# Altium PCB touch-1ch-sp.PcbDoc (part 2 of 3)
Units mm, origin at the board's own origin, x right, y up, seen from the top; angles counter-clockwise.
Board outline 151 x 86.38 mm, 2 copper layers (Top Layer, Bottom Layer); 26 components, 28 nets, 76 pads, 0 vias.
Unrouted connection lines stored in the file: 1.
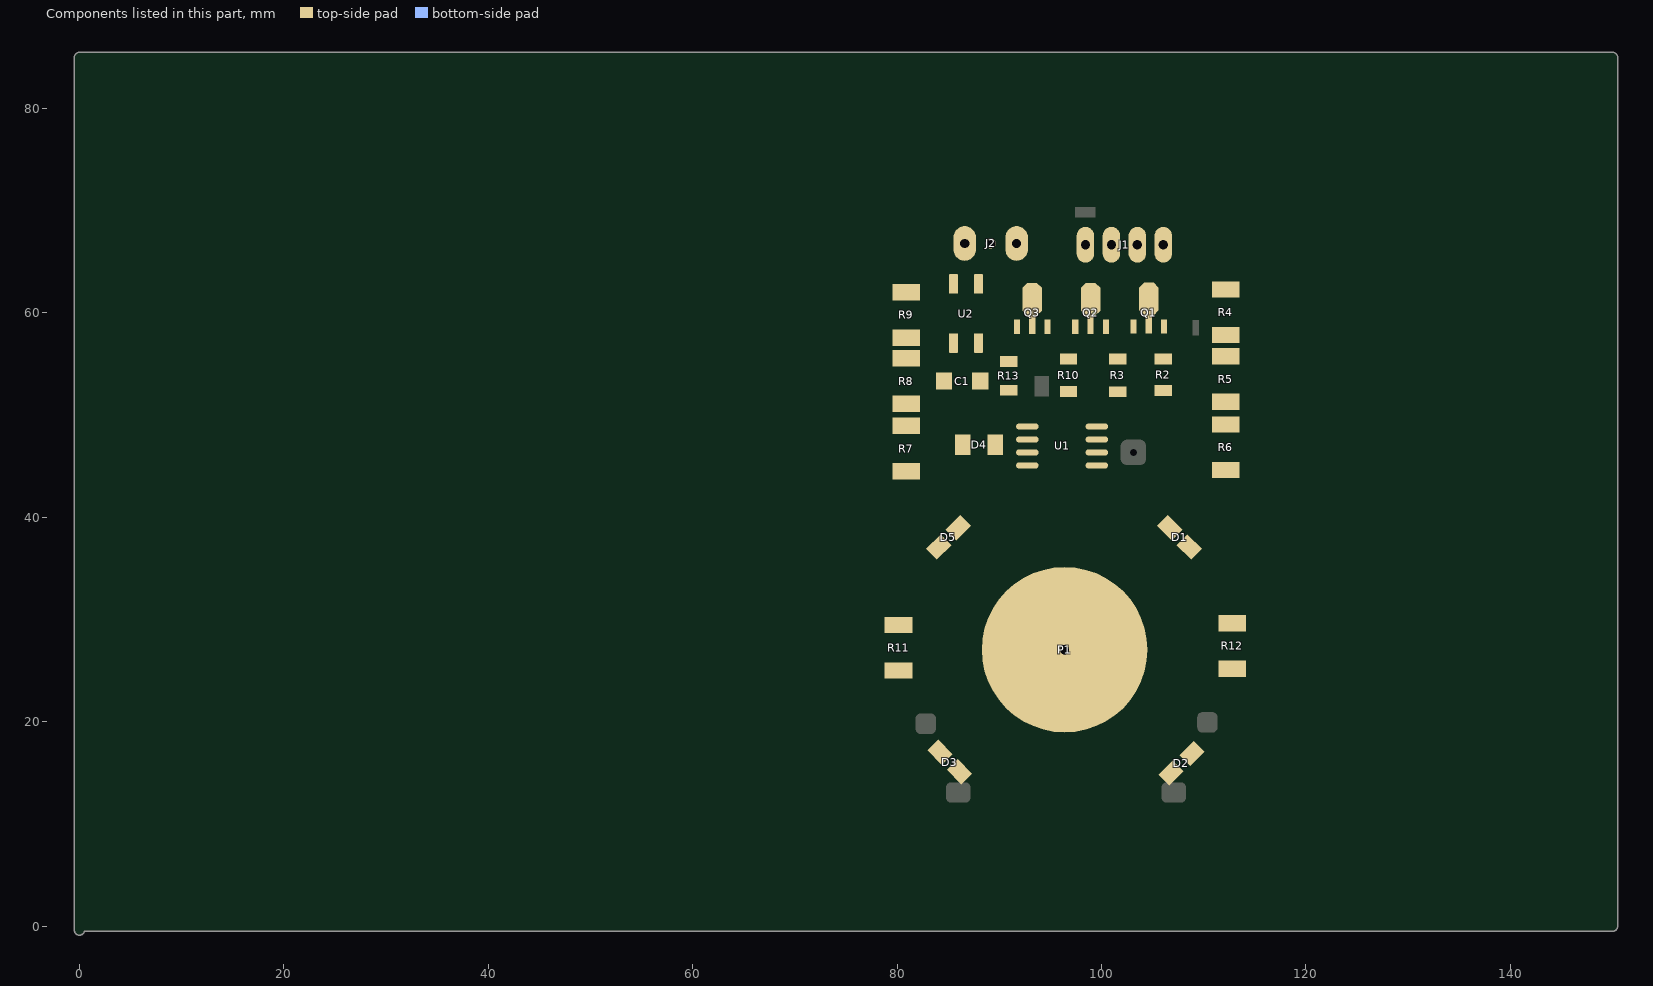
[diagram p2: the components of this part, seen from the top]

## Nets (pads, with @x,y where several pads share a name; then routed paths per layer and width w, separated by ;. In a path a pad name is that pad's centre, name@x,y a point inside that pad or via, vN(x,y) a via of type N, cw(c..) or ccw(c..) an arc to the next point about the centre after c; other vN are vias at no path point) (continued)
copper on no net: (continued)
  Top Layer w0.5: 30.3,43.431 30.3,43.43 30.3,43.426 30.3,43.422 30.3,43.418 30.3,43.414 30.3,43.41 30.299,43.407 30.299,43.403 30.299,43.399 30.299,43.395 30.299,43.391 30.299,43.387 30.299,43.383 30.299,43.38 30.299,43.376 30.299,43.372 30.299,43.368 30.298,43.364 30.298,43.36 30.298,43.357 30.298,43.353 30.298,43.349 30.298,43.345 30.298,43.341 30.298,43.337 30.298,43.333 30.297,43.33 30.297,43.326 30.297,43.322 30.297,43.318 30.297,43.314 30.297,43.31 30.297,43.306 30.297,43.303 30.297,43.3 30.297,43.297 30.296,43.295 30.296,43.292 30.296,43.29 30.296,43.287 30.296,43.285 30.296,43.282 30.296,43.279 30.296,43.277 30.296,43.274 30.296,43.272 30.296,43.269 30.296,43.266 30.296,43.264 30.295,43.261 30.295,43.259 30.295,43.256 30.295,43.254 30.295,43.251 30.295,43.248 30.295,43.246 30.295,43.243 30.295,43.241 30.295,43.238 30.295,43.236 30.295,43.233 30.294,43.23 30.294,43.228 30.294,43.225 30.294,43.223 30.294,43.22 30.294,43.217 30.294,43.215 30.294,43.212 30.294,43.21 30.294,43.207 30.294,43.205 30.294,43.202 30.293,43.199 30.293,43.197 30.293,43.194 30.293,43.192 30.293,43.189 30.293,43.186 30.293,43.184 30.293,43.181 30.293,43.179 30.293,43.176 30.293,43.174 30.292,43.171 30.292,43.168 30.292,43.166 30.292,43.164 30.292,43.163 30.292,43.162 30.292,43.161 30.292,43.159 30.292,43.158 30.292,43.157 30.292,43.155 30.292,43.154 30.292,43.153 30.292,43.152 30.292,43.15 30.292,43.149 30.292,43.148 30.292,43.146 30.292,43.145 30.292,43.144 30.292,43.142 30.291,43.141 30.291,43.14 30.291,43.139 30.291,43.137 30.291,43.136 30.291,43.135 30.291,43.133 30.291,43.132 30.291,43.131 30.291,43.13 30.291,43.128 30.291,43.127 30.291,43.126 30.291,43.124 30.291,43.123 30.291,43.122 30.291,43.12 30.291,43.119 30.291,43.118 30.291,43.117 30.291,43.115 30.291,43.114 30.29,43.113 30.29,43.111 30.29,43.11 30.29,43.109 30.29,43.107 30.29,43.106 30.29,43.105 30.29,43.104 30.29,43.102 30.29,43.101 30.29,43.1 30.29,43.098 30.29,43.097 30.29,43.096 30.29,43.095 30.29,43.093 30.29,43.092 30.29,43.091 30.29,43.089 30.29,43.088 30.29,43.087 30.29,43.085 30.289,43.084 30.289,43.083 30.289,43.082 30.289,43.08 30.289,43.079 30.289,43.078 30.289,43.076 30.289,43.075 30.289,43.074 30.289,43.072 30.289,43.071 30.289,43.07 30.289,43.069 30.289,43.067 30.289,43.066 30.289,43.065 30.289,43.063 30.289,43.062 30.289,43.061 30.289,43.059 30.289,43.058 30.288,43.057 30.288,43.056 30.288,43.054 30.288,43.053 30.288,43.052 30.288,43.05 30.288,43.049 30.288,43.048 30.288,43.047 30.288,43.045 30.288,43.044 30.288,43.043 30.288,43.041 30.288,43.04 30.288,43.039 30.288,43.037 30.288,43.036 30.288,43.035 30.288,43.034 30.288,43.032 30.288,43.031 30.288,43.03 30.287,43.028 30.287,43.027 30.287,43.026 30.287,43.024 30.287,43.023 30.287,43.022 30.287,43.021 30.287,43.019 30.287,43.018 30.287,43.017 30.287,43.015 30.287,43.014 30.287,43.013 30.287,43.011 30.287,43.01 30.287,43.009 30.287,43.008 30.287,43.006 30.287,43.005 30.287,43.004 30.287,43.002 30.287,43.001 30.286,43 30.286,42.998 30.286,42.997 30.286,42.996 30.286,42.995 30.286,42.993 30.286,42.992 30.286,42.991 30.286,42.989 30.286,42.988 30.286,42.987 30.286,42.985 30.286,42.984 30.286,42.983 30.286,42.982 30.286,42.98 30.286,42.979 30.286,42.978 30.286,42.976 30.286,42.975 30.286,42.974 30.286,42.972 30.285,42.971 30.285,42.97 30.285,42.969 30.285,42.967 30.285,42.966 30.285,42.965 30.285,42.963 30.285,42.962 30.285,42.961 30.285,42.959 30.285,42.958 30.285,42.957 30.285,42.956 30.285,42.954 30.285,42.953 30.285,42.952 30.285,42.95 30.285,42.949 30.285,42.948 30.285,42.946 30.285,42.945 30.285,42.944 30.284,42.943 30.284,42.941 30.284,42.94 30.284,42.939 30.284,42.937 30.284,42.936 30.284,42.935 30.284,42.933 30.284,42.932 30.284,42.931 30.284,42.93 30.284,42.928 30.284,42.927 30.284,42.926 30.284,42.924 30.284,42.923 30.284,42.922 30.284,42.92 30.284,42.919 30.284,42.918 30.284,42.917 30.284,42.915 30.283,42.914 30.283,42.913 30.283,42.911 30.283,42.91 30.283,42.909 30.283,42.907 30.283,42.906 30.283,42.904 30.283,42.901 30.283,42.898 30.283,42.896 30.283,42.893 30.283,42.891 30.283,42.888 30.283,42.885 30.282,42.883 30.282,42.88 30.282,42.878 30.282,42.875 30.282,42.872 30.282,42.87 30.282,42.867 30.282,42.865 30.282,42.862 30.282,42.859 30.282,42.857 30.281,42.854 30.281,42.852 30.281,42.849 30.281,42.846 30.281,42.844 30.281,42.841 30.281,42.839 30.281,42.836 30.281,42.833 30.281,42.831 30.281,42.828 30.281,42.826 30.28,42.823 30.28,42.82 30.28,42.818 30.28,42.815 30.28,42.813 30.28,42.81 30.28,42.807 30.28,42.805 30.28,42.802 30.28,42.799 30.28,42.797 30.28,42.794 30.279,42.792 30.279,42.789 30.279,42.786 30.279,42.784 30.279,42.781 30.279,42.779 30.279,42.776 30.279,42.772 30.279,42.768 30.279,42.764 30.279,42.76 30.278,42.757 30.278,42.753 30.278,42.749 30.278,42.745 30.278,42.741 30.278,42.737 30.278,42.733 30.278,42.729 30.278,42.725 30.277,42.721 30.277,42.718 30.277,42.714 30.277,42.71 30.277,42.706 30.277,42.702 30.277,42.698 30.277,42.694 30.277,42.69 30.276,42.686 30.276,42.682 30.276,42.679 30.276,42.675 30.276,42.671 30.276,42.667 30.276,42.663 30.276,42.659 30.276,42.655 30.276,42.651 30.276,42.647 30.275,42.643 30.275,42.64 30.275,42.636 30.275,42.63 30.275,42.625 30.275,42.62 30.275,42.615 30.275,42.61 30.275,42.604 30.275,42.599 30.274,42.594 30.274,42.589 30.274,42.584 30.274,42.578 30.274,42.573 30.274,42.568 30.274,42.563 30.274,42.558 30.274,42.553 30.274,42.547 30.273,42.542 30.273,42.537 30.273,42.532 30.273,42.527 30.273,42.521 30.273,42.516 30.273,42.511 30.273,42.506 30.273,42.501 30.273,42.495 30.273,42.49 30.273,42.484 30.273,42.477 30.273,42.471 30.273,42.464 30.272,42.458 30.272,42.451 30.272,42.445 30.272,42.439 30.272,42.432 30.272,42.426 30.272,42.419 30.272,42.413 30.272,42.406 30.272,42.4 30.272,42.393 30.272,42.387 30.272,42.38 ccw(c39.321,42.378) 30.272,42.374 30.272,42.367 30.272,42.361 30.272,42.355 30.272,42.348 30.272,42.342 30.272,42.335 30.272,42.329 30.272,42.322 30.272,42.315 30.272,42.307 30.272,42.299 30.273,42.292 30.273,42.284 30.273,42.276 30.273,42.268 30.273,42.261 30.273,42.253 30.273,42.245 30.273,42.238 30.273,42.23 30.274,42.222 30.274,42.215 30.274,42.207 30.274,42.199 30.274,42.192 30.274,42.184 30.275,42.176 30.275,42.168 30.275,42.161 30.275,42.153 30.276,42.146 30.276,42.137 30.292,41.621 32.555,39.264 32.548,39.264 32.534,39.264 32.52,39.264 32.507,39.265 32.493,39.265 32.479,39.265 32.465,39.265 32.451,39.265 32.437,39.265 32.424,39.265 32.41,39.265 32.396,39.265 32.382,39.265 32.368,39.265 32.354,39.265 32.34,39.265 32.326,39.265 32.313,39.265 32.299,39.265 32.285,39.265 32.271,39.265 32.257,39.265 32.243,39.265 32.229,39.264 32.211,39.264 32.194,39.264 32.177,39.264 32.159,39.263 32.142,39.263 32.124,39.263 32.107,39.262 32.089,39.262 32.072,39.262 32.054,39.261 32.037,39.261 32.019,39.26 32.002,39.26 31.984,39.259 31.967,39.259 31.949,39.258 31.932,39.257 31.914,39.257 31.897,39.256 31.879,39.255 31.862,39.254 31.844,39.254 31.827,39.253 31.809,39.252 31.792,39.251 31.774,39.25 31.757,39.249 31.739,39.248 31.722,39.247 31.704,39.246 31.687,39.245 31.669,39.244 31.652,39.243 31.634,39.242 31.617,39.24 31.6,39.239 31.582,39.238 31.565,39.236 31.547,39.235 31.53,39.233 31.513,39.232 31.495,39.231 31.478,39.229 31.461,39.227 31.443,39.226 31.426,39.224 31.409,39.222 31.391,39.221 31.374,39.219 31.357,39.217 31.339,39.215 31.322,39.213 31.305,39.211 31.288,39.209 31.271,39.207 31.253,39.205 31.236,39.203 31.219,39.201 31.202,39.199 31.185,39.196 31.168,39.194 31.151,39.192 31.134,39.189 31.117,39.187 31.1,39.184 31.083,39.182 31.066,39.179 31.049,39.177 31.032,39.174 31.015,39.171 30.998,39.168 30.981,39.166 30.964,39.163 30.948,39.16 30.931,39.157 30.914,39.154 30.897,39.151 30.881,39.148 30.864,39.145 30.847,39.141 30.831,39.138 30.814,39.135 30.798,39.131 30.781,39.128 30.765,39.124 30.748,39.121 30.732,39.117 30.715,39.114 30.699,39.11 30.683,39.106 30.666,39.102 30.65,39.098 30.634,39.095 30.617,39.091 30.601,39.086 30.585,39.082 30.569,39.078 30.553,39.074 30.537,39.07 30.521,39.065 30.505,39.061 30.489,39.057 30.473,39.052 30.457,39.048 30.442,39.043 30.426,39.038 30.41,39.033 30.394,39.029 30.379,39.024 30.363,39.019 30.347,39.014 30.332,39.009 30.316,39.004 30.301,38.999 30.283,38.992 30.264,38.986 30.246,38.979 30.228,38.973 30.209,38.966 30.191,38.959 30.173,38.953 30.155,38.946 30.137,38.939 30.119,38.931 30.101,38.924 30.084,38.917 30.066,38.909 30.048,38.902 30.031,38.894 30.013,38.886 29.996,38.879 29.979,38.871 29.961,38.863 29.944,38.854 29.927,38.846 29.91,38.838 29.893,38.829 29.876,38.821 29.86,38.812 29.843,38.803 29.826,38.795 29.807,38.784 29.788,38.773 29.769,38.763 29.75,38.752 29.731,38.741 29.713,38.729 29.694,38.718 29.676,38.707 29.657,38.695 29.637,38.681 29.616,38.668 29.595,38.654 29.575,38.639 29.555,38.625 29.533,38.609 29.51,38.592 29.488,38.575 29.464,38.556 29.44,38.536 29.414,38.515 ccw(c30.791,36.903) 29.384,38.488 29.376,38.481 29.359,38.466 29.342,38.451 29.326,38.436 29.309,38.42 29.293,38.405 29.277,38.39 29.261,38.375 29.245,38.36 29.23,38.345 29.214,38.33 29.199,38.315 29.184,38.3 29.168,38.285 29.154,38.27 29.139,38.255 29.124,38.24 29.11,38.225 29.095,38.21 29.081,38.195 29.067,38.18 29.053,38.164 29.036,38.146 29.019,38.127 29.002,38.108 28.986,38.089 28.969,38.07 28.953,38.052 28.937,38.033 28.921,38.014 28.906,37.995 28.891,37.976 28.875,37.957 28.858,37.935 28.84,37.912 28.823,37.889 28.806,37.867 28.789,37.844 28.77,37.818 28.751,37.791 28.732,37.765 28.712,37.734 28.692,37.704 28.67,37.67 28.648,37.636 28.625,37.598 28.598,37.552 ccw(c31.259,36.015) 28.568,37.499 ccw(c31.21,36.041) 28.427,37.207 ccw(c31.23,36.033) 28.395,37.129 ccw(c31.26,36.021) 28.375,37.075 28.36,37.032 28.346,36.992 28.335,36.957 28.325,36.926 28.315,36.894 28.307,36.867 28.299,36.839 28.293,36.815 28.286,36.791 28.28,36.767 28.274,36.744 28.269,36.724 28.264,36.704 28.26,36.684 28.255,36.664 28.251,36.644 28.246,36.623 28.242,36.603 28.238,36.583 28.235,36.567 28.232,36.551 28.229,36.535 28.226,36.518 28.223,36.502 28.22,36.486 28.217,36.47 28.214,36.453 28.212,36.437 28.209,36.421 28.207,36.404 28.204,36.388 28.202,36.372 28.199,36.355 28.197,36.339 28.195,36.326 28.194,36.314 28.192,36.302 28.19,36.289 28.189,36.277 28.187,36.264 28.186,36.252 28.184,36.24 28.183,36.227 28.181,36.215 28.18,36.202 28.179,36.19 28.177,36.177 28.176,36.165 28.175,36.152 28.173,36.14 28.172,36.127 28.171,36.114 28.17,36.102 28.169,36.089 28.168,36.077 28.167,36.064 28.166,36.051 28.165,36.039 28.164,36.026 28.163,36.013 28.162,36 28.161,35.988 28.16,35.975 28.159,35.962 28.158,35.949 28.157,35.937 28.157,35.924 28.156,35.915 28.155,35.907 28.155,35.898 28.154,35.89 28.154,35.881 28.154,35.872 28.153,35.864 28.153,35.855 28.152,35.847 28.152,35.838 28.151,35.829 28.151,35.821 28.151,35.812 28.15,35.804 28.15,35.795 28.149,35.786 28.149,35.778 28.149,35.769 28.148,35.76 28.148,35.752 28.148,35.743 28.147,35.734 28.147,35.725 28.147,35.717 28.146,35.708 28.146,35.699 28.146,35.691 28.146,35.682 28.145,35.673 28.145,35.664 28.145,35.655 28.145,35.647 28.144,35.638 28.144,35.629 28.144,35.62 28.144,35.612 28.144,35.603 28.143,35.594 28.143,35.585 28.143,35.576 28.143,35.567 28.143,35.559 28.142,35.55 28.142,35.541 28.142,35.532 28.142,35.523 28.142,35.514 28.142,35.505 28.142,35.496 28.142,35.487 28.141,35.478 28.141,35.47 28.141,35.461 28.141,35.452 28.141,35.443 28.141,35.434 28.141,35.425 28.141,35.416 28.141,35.407 28.141,35.398 28.141,35.389 28.141,35.38 28.141,35.371 28.141,35.362 28.14,35.357 28.14,35.353 28.14,35.348 28.14,35.344 28.14,35.339 28.14,35.335 28.14,35.33 28.14,35.325 28.14,35.321 28.14,35.316 28.14,35.312 28.14,35.307 28.14,35.303 28.14,35.298 ccw(c47.337,35.295) 28.14,35.294 28.14,35.289 28.14,35.285 28.14,35.28 28.14,35.275 28.14,35.271 28.14,35.266 28.14,35.262 28.14,35.257 28.14,35.253 28.14,35.248 28.14,35.243 28.14,35.239 28.14,35.234 28.14,35.23 28.141,35.225 28.141,35.221 28.141,35.216 28.141,35.211 28.141,35.207 28.141,35.202 28.141,35.198 28.141,35.193 28.141,35.188 28.141,35.184 28.141,35.179 28.141,35.175 28.141,35.17 28.141,35.165 28.141,35.161 28.141,35.156 28.141,35.151 28.141,35.147 28.141,35.142 28.141,35.138 28.141,35.133 28.141,35.128 28.141,35.124 28.141,35.119 28.141,35.114 28.141,35.11 28.141,35.105 28.141,35.101 28.141,35.096 28.141,35.091 28.141,35.087 28.141,35.082 28.141,35.077 28.141,35.073 28.141,35.068 28.142,35.063 28.142,35.059 28.142,35.054 28.142,35.049 28.142,35.045 28.142,35.04 28.142,35.035 28.142,35.031 28.142,35.026 28.142,35.021 28.142,35.017 28.142,35.012 28.142,35.007 28.142,35.002 28.142,34.998 28.142,34.993 28.142,34.988 28.142,34.984 28.142,34.979 28.142,34.974 28.142,34.97 28.142,34.965 28.143,34.96 28.143,34.955 28.143,34.951 28.143,34.946 28.143,34.941 28.143,34.937 28.143,34.932 28.143,34.927 28.143,34.922 28.143,34.918 28.143,34.913 28.143,34.908 28.143,34.903 28.143,34.899 28.143,34.894 28.143,34.889 28.143,34.884 28.143,34.88 28.143,34.875 28.144,34.87 28.144,34.865 28.144,34.861 28.144,34.856 28.144,34.851 28.144,34.846 28.144,34.842 28.144,34.837 28.144,34.832 28.144,34.827 28.144,34.822 28.144,34.818 28.144,34.813 28.144,34.808 28.144,34.803 28.144,34.798 28.144,34.794 28.144,34.789 28.144,34.784 28.145,34.779 28.145,34.774 28.145,34.77 28.145,34.765 28.145,34.76 28.145,34.755 28.145,34.75 28.145,34.746 28.145,34.741 28.145,34.736 28.145,34.731 28.145,34.726 28.145,34.721 28.145,34.717 28.145,34.712 28.145,34.707 28.145,34.702 28.145,34.697 28.145,34.692 28.146,34.687 28.146,34.683 28.146,34.678 28.146,34.673 28.146,34.668 28.146,34.663 28.146,34.658 28.146,34.653 28.146,34.649 28.146,34.644 28.146,34.639 28.146,34.634 28.146,34.629 28.146,34.624 28.146,34.619 28.146,34.614 28.146,34.609 28.146,34.605 28.146,34.6 28.146,34.595 28.146,34.59 28.147,34.585 28.147,34.58 28.147,34.575 28.147,34.57 28.147,34.565 28.147,34.56 28.147,34.555 28.147,34.55 28.147,34.546 28.147,34.541 28.147,34.536 28.147,34.531 28.147,34.526 28.147,34.521 28.147,34.516 28.147,34.511 28.147,34.506 28.147,34.501 28.147,34.496 28.147,34.491 28.147,34.486 28.147,34.481 28.147,34.476 28.147,34.471 28.147,34.466 28.147,34.461 28.147,34.456 28.147,34.451 28.147,34.446 28.147,34.441 28.147,34.436 28.147,34.431 28.148,34.426 28.148,34.421 28.148,34.416 28.148,34.411 28.148,34.401 28.148,34.391 28.148,34.381 28.148,34.371 28.148,34.361 28.148,34.351 28.148,34.341 28.148,34.326 28.147,18.52 28.147,18.512 28.147,18.488 28.147,18.464 28.147,18.44 28.147,18.416 28.147,18.392 28.147,18.368 28.147,18.344 28.147,18.32 28.147,18.296 28.147,18.272 28.147,18.248 28.147,18.224 28.147,18.2 28.147,18.176 28.147,18.152 28.146,18.128 28.146,18.104 28.146,18.08 28.146,18.056 28.146,18.032 28.146,18.008 28.146,17.984 28.146,17.959 28.146,17.935 28.146,17.911 28.146,17.887 28.146,17.863 28.146,17.839 28.145,17.815 28.145,17.791 28.145,17.767 28.145,17.743 28.145,17.727 28.145,17.711 28.145,17.695 28.145,17.679 28.145,17.663 28.145,17.647 28.145,17.631 28.145,17.615 28.144,17.599 28.144,17.583 28.144,17.567 28.144,17.551 28.144,17.535 28.144,17.519 28.144,17.503 28.144,17.487 28.144,17.471 28.144,17.455 28.144,17.439 28.144,17.423 28.143,17.407 28.143,17.39 28.143,17.374 28.143,17.358 28.143,17.342 28.143,17.326 28.143,17.31 28.143,17.294 28.143,17.278 28.143,17.262 28.142,17.246 28.142,17.23 28.142,17.214 28.142,17.198 28.142,17.182 28.142,17.166 28.142,17.15 28.142,17.134 28.142,17.118 28.142,17.102 28.141,17.086 28.141,17.07 28.141,17.054 28.141,17.038 28.141,17.022 28.141,17.006 28.141,16.99 28.141,16.974 28.141,16.958 28.14,16.942 28.14,16.934 28.14,16.926 28.14,16.918 28.14,16.91 28.14,16.902 28.14,16.894 28.14,16.886 28.14,16.878 28.14,16.87 28.14,16.862 28.14,16.853 28.14,16.845 28.14,16.837 28.14,16.829 28.14,16.821 28.14,16.813 28.139,16.805 28.139,16.797 28.139,16.789 28.139,16.781 28.139,16.773 28.139,16.765 28.139,16.757 28.139,16.749 28.139,16.741 28.139,16.733 28.139,16.725 28.139,16.717 28.139,16.709 28.139,16.701 28.139,16.693 28.139,16.685 28.139,16.677 28.138,16.669 28.138,16.661 28.138,16.653 28.138,16.645 28.138,16.637 28.138,16.629 28.138,16.621 28.138,16.613 28.138,16.605 28.138,16.597 28.138,16.589 28.138,16.581 28.138,16.573 28.138,16.565 28.138,16.557 28.138,16.549 28.137,16.541 28.137,16.533 28.137,16.525 28.137,16.517 28.137,16.509 28.137,16.501 28.137,16.493 28.137,16.485 28.137,16.477 28.137,16.469 28.137,16.461 28.137,16.453 28.137,16.445 28.137,16.437 28.137,16.429 28.137,16.421 28.136,16.413 28.136,16.405 28.136,16.397 28.136,16.389 28.136,16.381 28.136,16.373 28.136,16.365 28.136,16.357 28.136,16.349 28.136,16.341 28.136,16.332 28.136,16.324 28.136,16.316 28.136,16.308 28.136,16.3 28.135,16.292 28.135,16.284 28.135,16.276 28.135,16.268 28.135,16.26 28.135,16.252 28.135,16.244 28.135,16.236 28.135,16.228 28.135,16.22 28.135,16.212 28.135,16.204 28.135,16.196 28.135,16.188 28.135,16.18 28.135,16.172 28.134,16.164 28.134,16.156 28.134,16.148 28.134,16.14 28.134,16.132 28.134,16.124 28.134,16.116 28.134,16.108 28.134,16.1 28.134,16.092 28.134,16.084 28.134,16.076 28.134,16.068 28.134,16.06 28.134,16.052 28.134,16.044 28.133,16.036 28.133,16.028 28.133,16.02 28.133,16.012 28.133,16.004 28.133,15.996 28.133,15.988 28.133,15.98 28.133,15.972 28.133,15.964 28.133,15.956 28.133,15.948 28.133,15.94 28.133,15.932 28.133,15.924 28.132,15.916 28.132,15.908 28.132,15.9 28.132,15.892 28.132,15.884 28.132,15.876 28.132,15.868 28.132,15.86 28.132,15.852 28.132,15.844 28.132,15.835 28.132,15.827 28.132,15.819 28.132,15.811 28.132,15.803 28.132,15.795 28.131,15.787 28.131,15.779 28.131,15.771 28.131,15.763 28.131,15.755 28.131,15.747 28.131,15.739 28.131,15.731 28.131,15.723 28.131,15.715 28.131,15.707 28.131,15.699 28.131,15.691 28.131,15.683 28.131,15.675 28.131,15.667 28.13,15.659 28.13,15.651 28.13,15.643 28.13,15.635 28.13,15.627 28.13,15.619 28.13,15.611 28.13,15.603 28.13,15.595 28.13,15.587 28.13,15.579 28.13,15.571 28.13,15.563 28.13,15.555 28.13,15.547 28.13,15.539 28.129,15.531 28.129,15.523 28.129,15.515 28.129,15.507 28.129,15.499 28.129,15.491 28.129,15.483 28.129,15.475 28.129,15.467 28.129,15.459 28.129,15.451 28.129,15.443 28.129,15.435 28.129,15.427 28.129,15.419 28.129,15.411 28.129,15.403 28.128,15.395 28.128,15.387 28.128,15.379 28.128,15.371 28.128,15.363 28.128,15.355 28.128,15.347 28.128,15.338 28.128,15.322 28.128,15.306 28.128,15.29 28.128,15.274 28.128,15.258 28.127,15.242 28.127,15.226 28.127,15.21 28.127,15.194 28.127,15.178 28.127,15.162 28.127,15.146 28.127,15.13 28.127,15.114 28.126,15.098 28.126,15.082 28.126,15.066 28.126,15.05 28.126,15.034 28.126,15.018 28.126,15.002 28.126,14.986 28.126,14.97 28.126,14.954 28.125,14.938 28.125,14.922 28.125,14.906 28.125,14.89 28.125,14.874 28.125,14.858 28.125,14.841 28.125,14.825 28.125,14.809 28.125,14.793 28.125,14.777 28.124,14.761 28.124,14.745 28.124,14.729 28.124,14.713 28.124,14.697 28.124,14.681 28.124,14.665 28.124,14.649 28.124,14.633 28.124,14.617 28.124,14.601 28.124,14.585 28.123,14.569 28.123,14.553 28.123,14.529 28.123,14.505 28.123,14.481 28.123,14.457 28.123,14.433 28.123,14.409 28.123,14.385 28.123,14.361 28.123,14.336 28.122,14.312 28.122,14.288 28.122,14.264 28.122,14.24 28.122,14.216 28.122,14.192 28.122,14.168 28.122,14.144 28.122,14.12 28.122,14.096 28.122,14.072 28.122,14.048 28.122,14.024 28.122,14 28.122,13.976 28.122,13.952 28.122,13.928 28.122,13.904 28.122,13.88 28.121,13.856 28.121,13.831 28.121,13.807 28.121,13.783 28.121,13.759 ccw(c178.059,13.739) 28.121,13.735 28.121,13.703 28.121,13.671 28.121,13.639 28.121,13.607 28.122,13.575 28.122,13.543 28.122,13.511 28.122,13.479 28.122,13.447 28.122,13.415 28.122,13.383 28.122,13.351 28.122,13.318 28.122,13.286 28.122,13.254 28.122,13.222 28.123,13.19 28.123,13.158 28.123,13.126 28.123,13.094 28.123,13.062 28.123,13.03 28.123,12.998 28.124,12.966 28.124,12.934 28.124,12.894 28.124,12.854 28.125,12.814 28.125,12.773 28.125,12.733 28.126,12.693 28.126,12.653 28.126,12.613 28.127,12.573 28.127,12.533 28.128,12.493 28.128,12.453 28.128,12.413 28.129,12.373 28.129,12.333 28.13,12.293 28.13,12.253 28.131,12.212 28.131,12.172 28.132,12.132 28.133,12.084 28.133,12.036 28.134,11.988 28.135,11.94 28.136,11.892 28.137,11.844 28.137,11.796 28.138,11.748 28.139,11.7 28.14,11.652 28.141,11.603 28.142,11.555 28.143,11.507 28.144,11.459 28.145,11.411 28.147,11.363 28.148,11.307 28.149,11.251 28.151,11.195 28.152,11.139 28.154,11.083 28.155,11.027 28.157,10.971 28.159,10.915 28.16,10.858 28.162,10.802 28.164,10.746 28.166,10.69 28.168,10.634 28.17,10.578 28.172,10.506 28.165,9.447 28.28,9.223 28.281,9.221 28.282,9.217 28.284,9.212 28.285,9.208 28.286,9.204 28.288,9.2 28.289,9.196 28.29,9.192 28.292,9.187 28.293,9.183 28.294,9.179 28.296,9.175 28.297,9.171 28.298,9.167 28.3,9.163 28.301,9.159 28.302,9.155 28.304,9.15 28.305,9.146 28.306,9.142 28.307,9.138 28.309,9.134 28.31,9.13 28.311,9.126 28.313,9.122 28.314,9.118 28.315,9.114 28.317,9.11 28.318,9.106 28.319,9.102 28.321,9.098 28.322,9.094 28.323,9.09 28.325,9.086 28.326,9.082 28.327,9.078 28.328,9.074 28.33,9.07 28.331,9.066 28.332,9.062 28.334,9.058 28.335,9.054 28.336,9.05 28.338,9.046 28.339,9.042 28.341,9.036 28.343,9.03 28.345,9.025 28.347,9.019 28.349,9.013 28.351,9.007 28.353,9.001 28.355,8.995 28.357,8.99 28.359,8.984 28.361,8.978 28.363,8.972 28.365,8.967 28.367,8.961 28.369,8.955 28.371,8.949 28.373,8.944 28.375,8.938 28.377,8.932 28.379,8.927 28.381,8.921 28.383,8.915 28.385,8.91 28.387,8.904 28.389,8.898 28.391,8.893 28.393,8.887 28.395,8.882 28.397,8.876 28.399,8.871 28.401,8.865 28.403,8.859 28.405,8.854 28.407,8.848 28.409,8.843 28.411,8.837 28.413,8.832 28.415,8.826 28.417,8.821 28.419,8.816 28.421,8.81 28.423,8.805 28.425,8.799 28.428,8.794 28.43,8.787 28.433,8.779 28.436,8.772 28.439,8.765 28.441,8.758 28.444,8.751 28.447,8.744 28.45,8.737 28.453,8.73 28.456,8.723 28.458,8.716 28.461,8.709 28.464,8.702 28.467,8.695 28.47,8.688 28.473,8.681 28.476,8.674 28.478,8.667 28.481,8.66 28.484,8.653 28.487,8.646 28.491,8.638 28.495,8.629 28.498,8.621 28.502,8.612 28.506,8.604 28.51,8.595 28.513,8.587 28.517,8.578 28.521,8.57 28.525,8.562 28.529,8.553 28.533,8.543 28.538,8.533 28.543,8.523 28.547,8.513 28.552,8.503 28.557,8.494 28.562,8.482 28.568,8.471 28.574,8.459 28.58,8.448 28.586,8.435 28.593,8.422 28.6,8.409 28.607,8.395 28.615,8.381 28.624,8.365 28.633,8.347 28.645,8.327 28.658,8.305 28.674,8.277 ccw(c30.917,9.625) 28.768,8.132 ccw(c30.932,9.636) 28.796,8.093 28.816,8.066 28.833,8.043 28.848,8.023 28.862,8.005 28.875,7.989 28.887,7.974 28.898,7.96 28.909,7.947 28.92,7.933 28.931,7.921 28.941,7.909 28.951,7.897 28.96,7.887 28.97,7.876 28.979,7.866 28.988,7.855 28.998,7.845 29.006,7.835 29.015,7.826 29.023,7.817 29.031,7.808 29.04,7.799 29.048,7.79 29.057,7.781 29.066,7.772 29.075,7.763 29.084,7.754 29.091,7.746 29.098,7.739 29.106,7.731 29.114,7.724 29.121,7.716 29.129,7.708 29.137,7.701 29.145,7.693 29.152,7.686 29.16,7.678 29.168,7.67 29.176,7.663 29.184,7.655 29.192,7.647 29.201,7.64 29.209,7.632 29.217,7.624 29.226,7.616 29.234,7.609 29.242,7.601 29.251,7.593 29.259,7.585 29.266,7.579 29.273,7.573 29.282,7.565 29.311,7.54 29.355,7.502 ccw(c31.489,10.04) 29.404,7.462 ccw(c31.468,10.014) 29.459,7.418 ccw(c31.447,9.987) 29.529,7.366 ccw(c31.41,9.935) 29.972,7.094 ccw(c31.423,9.961) 30.075,7.044 ccw(c31.437,9.991) 30.151,7.01 ccw(c31.451,10.022) 30.215,6.983 ccw(c31.463,10.053) 30.273,6.96 30.324,6.941 30.373,6.924 30.417,6.909 30.458,6.895 30.5,6.882 30.54,6.87 30.578,6.859 30.615,6.849 30.65,6.839 30.686,6.831 30.718,6.823 30.751,6.815 30.784,6.807 30.815,6.801 30.846,6.794 30.877,6.788 30.907,6.782 30.938,6.777 30.967,6.772 30.995,6.767 31.024,6.763 31.053,6.758 31.081,6.754 31.11,6.75 31.136,6.747 31.163,6.743 31.189,6.74 31.216,6.737 31.242,6.734 31.268,6.732 31.295,6.729 31.322,6.727 31.348,6.724 31.375,6.722 31.402,6.72 31.426,6.719 31.45,6.717 31.475,6.716 31.499,6.715 31.523,6.714 31.547,6.713 31.572,6.712 31.596,6.711 31.621,6.71 31.645,6.71 31.67,6.709 31.695,6.709 31.722,6.709 31.734,6.708 31.747,6.708 31.759,6.708 31.772,6.708 31.782,6.708 31.793,6.708 31.803,6.708 31.813,6.708 31.824,6.708 31.834,6.708 31.844,6.707 31.855,6.707 31.865,6.707 31.876,6.707 31.886,6.707 31.896,6.707 31.907,6.707 31.917,6.707 31.928,6.707 31.938,6.706 31.948,6.706 31.959,6.706 31.969,6.706 31.979,6.706 31.99,6.706 31.998,6.706 32.006,6.705 32.015,6.705 32.023,6.705 32.031,6.705 32.04,6.705 32.048,6.705 32.056,6.705 32.065,6.705 32.073,6.704 32.081,6.704 32.09,6.704 32.098,6.704 32.106,6.704 32.114,6.704 32.123,6.704 32.131,6.703 32.139,6.703 32.148,6.703 32.156,6.703 32.164,6.703 32.173,6.703 32.181,6.703 32.189,6.702 32.198,6.702 32.204,6.702 32.21,6.702 32.216,6.702 32.222,6.702 32.229,6.702 32.235,6.702 32.241,6.701 32.247,6.701 32.254,6.701 32.26,6.701 32.266,6.701 32.272,6.701 32.279,6.701 32.285,6.701 32.291,6.7 32.297,6.7 32.303,6.7 32.31,6.7 32.316,6.7 32.322,6.7 32.328,6.7 32.335,6.7 32.341,6.699 32.347,6.699 32.353,6.699 32.36,6.699 32.366,6.699 32.372,6.699 32.378,6.699 32.385,6.699 32.391,6.698 32.397,6.698 32.403,6.698 32.407,6.698 32.412,6.698 32.416,6.698 32.42,6.698 32.424,6.698 32.428,6.698 32.432,6.697 32.436,6.697 32.441,6.697 32.445,6.697 32.449,6.697 32.453,6.697 32.457,6.697 32.461,6.697 32.466,6.697 32.47,6.697 32.474,6.697 32.478,6.696 32.482,6.696 32.486,6.696 32.49,6.696 32.495,6.696 32.499,6.696 32.503,6.696 32.507,6.696 32.511,6.696 32.515,6.696 32.52,6.696 32.524,6.695 32.528,6.695 32.532,6.695 32.536,6.695 32.54,6.695 32.545,6.695 32.549,6.695 32.553,6.695 32.557,6.695 32.561,6.695 32.565,6.695 32.569,6.694 32.574,6.694 32.578,6.694 32.582,6.694 32.586,6.694 32.59,6.694 32.594,6.694 32.599,6.694 32.603,6.694 32.607,6.694 32.611,6.693 32.615,6.693 32.617,6.693 32.619,6.693 32.621,6.693 32.623,6.693 32.626,6.693 32.628,6.693 32.63,6.693 32.632,6.693 32.634,6.693 32.636,6.693 32.638,6.693 32.64,6.693 32.642,6.693 32.644,6.693 32.646,6.693 32.648,6.693 32.65,6.693 32.653,6.692 32.655,6.692 32.657,6.692 32.659,6.692 32.661,6.692 32.663,6.692 32.665,6.692 32.667,6.692 32.669,6.692 32.671,6.692 32.673,6.692 32.675,6.692 32.677,6.692 32.68,6.692 32.682,6.692 32.684,6.692 32.686,6.692 32.688,6.692 32.69,6.692 32.692,6.692 32.694,6.691 32.696,6.691 32.698,6.691 32.7,6.691 32.702,6.691 32.704,6.691 32.707,6.691 32.709,6.691 32.711,6.691 32.713,6.691 32.715,6.691 32.717,6.691 32.719,6.691 32.721,6.691 32.723,6.691 32.725,6.691 32.727,6.691 32.729,6.691 32.732,6.691 32.734,6.691 32.736,6.69 32.738,6.69 32.74,6.69 32.742,6.69 32.744,6.69 32.746,6.69 32.748,6.69 32.75,6.69 32.752,6.69 32.754,6.69 32.756,6.69 32.759,6.69 32.761,6.69 32.763,6.69 32.765,6.69 32.767,6.69 32.769,6.69 32.771,6.69 32.773,6.69 32.775,6.69 32.777,6.689 32.779,6.689 32.781,6.689 32.783,6.689 32.786,6.689 32.788,6.689 32.79,6.689 32.792,6.689 32.794,6.689 32.796,6.689 32.798,6.689 32.8,6.689 32.802,6.689 32.804,6.689 32.806,6.689 32.808,6.689 32.81,6.689 32.813,6.689 32.815,6.689 32.817,6.689 32.819,6.688 32.821,6.688 32.823,6.688 32.825,6.688 32.827,6.688 32.829,6.688 32.831,6.688 32.833,6.688 32.835,6.688 32.837,6.688 32.84,6.688 32.842,6.688 32.844,6.688 32.846,6.688 32.848,6.688 32.85,6.688 32.852,6.688 32.854,6.688 32.856,6.688 32.858,6.688 32.86,6.687 32.862,6.687 32.864,6.687 32.867,6.687 32.869,6.687 32.871,6.687 32.873,6.687 32.875,6.687 32.877,6.687 32.879,6.687 32.881,6.687 32.883,6.687 32.885,6.687 32.887,6.687 32.889,6.687 32.892,6.687 32.894,6.687 32.896,6.687 32.898,6.687 32.9,6.687 32.902,6.686 32.904,6.686 32.906,6.686 32.908,6.686 32.91,6.686 32.912,6.686 32.914,6.686 32.916,6.686 32.919,6.686 32.921,6.686 32.923,6.686 32.925,6.686 32.927,6.686 32.929,6.686 32.931,6.686 32.933,6.686 32.935,6.686 32.937,6.686 32.939,6.686 32.941,6.686 32.943,6.685 32.946,6.685 32.948,6.685 32.95,6.685 32.952,6.685 32.954,6.685 32.956,6.685 32.958,6.685 32.96,6.685 32.962,6.685 32.964,6.685 32.966,6.685 32.968,6.685 32.97,6.685 32.973,6.685 32.975,6.685 32.977,6.685 32.979,6.685 32.981,6.685 32.983,6.685 32.985,6.684 32.987,6.684 32.989,6.684 32.991,6.684 32.993,6.684 32.995,6.684 32.997,6.684 33,6.684 33.002,6.684 33.004,6.684 33.006,6.684 33.008,6.684 33.01,6.684 33.012,6.684 33.014,6.684 33.016,6.684 33.018,6.684 33.02,6.684 33.022,6.684 33.025,6.684 33.027,6.684 33.029,6.683 33.031,6.683 33.035,6.683 33.039,6.683 33.043,6.683 33.047,6.683 33.052,6.683 33.056,6.683 33.06,6.683 33.064,6.683 33.068,6.683 33.072,6.682 33.076,6.682 33.081,6.682 33.085,6.682 33.089,6.682 33.093,6.682 33.097,6.682 33.101,6.682 33.106,6.682 33.11,6.682 33.114,6.681 33.118,6.681 33.122,6.681 33.126,6.681 33.13,6.681 33.135,6.681 33.139,6.681 33.143,6.681 33.147,6.681 33.151,6.681 33.155,6.681 33.16,6.68 33.164,6.68 33.168,6.68 33.172,6.68 33.176,6.68 33.18,6.68 33.185,6.68 33.189,6.68 33.193,6.68 33.197,6.68 33.201,6.68 33.205,6.679 33.209,6.679 33.214,6.679 33.218,6.679 33.222,6.679 33.226,6.679 33.23,6.679 33.234,6.679 33.239,6.679 33.245,6.679 33.251,6.678 33.257,6.678 33.263,6.678 33.27,6.678 33.276,6.678 33.282,6.678 33.288,6.678 33.295,6.678 33.301,6.677 33.307,6.677 33.313,6.677 33.32,6.677 33.326,6.677 33.332,6.677 33.338,6.677 33.345,6.676 33.351,6.676 33.357,6.676 33.363,6.676 33.369,6.676 33.376,6.676 33.382,6.676 33.388,6.676 33.394,6.675 33.401,6.675 33.407,6.675 33.413,6.675 33.419,6.675 33.426,6.675 33.432,6.675 33.438,6.675 33.444,6.675 33.453,6.674 33.461,6.674 33.469,6.674 33.478,6.674 33.486,6.674 33.494,6.674 33.502,6.674 33.511,6.673 33.519,6.673 33.527,6.673 33.536,6.673 33.544,6.673 33.552,6.673 33.561,6.673 33.569,6.672 33.577,6.672 33.586,6.672 33.594,6.672 33.602,6.672 33.611,6.672 33.619,6.672 33.627,6.671 33.635,6.671 33.644,6.671 33.652,6.671 33.662,6.671 33.673,6.671 33.683,6.671 33.694,6.671 33.704,6.67 33.714,6.67 33.725,6.67 33.735,6.67 33.746,6.67 33.756,6.67 33.766,6.67 33.777,6.67 33.787,6.669 33.8,6.669 33.802,6.669 33.803,6.669 33.805,6.669 33.807,6.669 33.809,6.669 33.811,6.669 33.813,6.669 33.815,6.669 33.817,6.669 33.819,6.669 33.821,6.669 33.823,6.669 33.825,6.669 33.827,6.669 33.829,6.669 33.831,6.669 33.833,6.669 33.835,6.669 33.837,6.669 33.839,6.669 33.841,6.669 33.843,6.669 33.844,6.669 33.846,6.669 33.848,6.669 33.85,6.669 33.852,6.669 33.854,6.669 33.856,6.669 33.858,6.669 33.86,6.669 33.862,6.669 33.864,6.669 33.866,6.669 33.868,6.669 33.87,6.669 33.872,6.669 33.874,6.669 33.876,6.669 33.878,6.668 33.88,6.668 33.882,6.668 33.884,6.668 33.886,6.668 33.888,6.668 33.89,6.668 33.892,6.668 33.894,6.668 33.895,6.668 33.897,6.668 33.899,6.668 33.901,6.668 33.903,6.668 33.905,6.668 33.907,6.668 33.909,6.668 33.911,6.668 33.913,6.668 33.915,6.668 33.917,6.668 33.919,6.668 33.921,6.668 33.923,6.668 33.925,6.668 33.927,6.668 33.929,6.668 33.931,6.668 33.933,6.668 33.935,6.668 33.937,6.668 33.939,6.668 33.941,6.668 33.943,6.668 33.945,6.668 33.947,6.668 33.949,6.668 33.951,6.668 33.953,6.668 33.955,6.668 33.957,6.668 33.959,6.668 33.961,6.668 33.963,6.668 33.965,6.668 33.967,6.668 33.969,6.668 33.971,6.668 33.973,6.668 33.975,6.668 33.977,6.668 33.979,6.668 33.98,6.667 33.982,6.667 33.984,6.667 33.986,6.667 33.988,6.667 33.99,6.667 33.992,6.667 33.994,6.667 33.996,6.667 34,6.667 34.004,6.667 34.008,6.667 34.012,6.667 34.016,6.667 34.02,6.667 34.024,6.667 34.028,6.667 34.032,6.667 34.036,6.667 34.04,6.667 34.044,6.667 34.048,6.667 34.052,6.667 34.056,6.667 34.06,6.667 34.064,6.667 34.068,6.667 34.072,6.667 34.076,6.667 34.08,6.667 34.084,6.667 34.088,6.667 34.092,6.667 34.096,6.667 34.1,6.666 34.104,6.666 34.108,6.666 34.112,6.666 34.116,6.666 34.12,6.666 34.124,6.666 34.129,6.666 34.133,6.666 34.137,6.666 34.141,6.666 34.145,6.666 34.149,6.666 34.153,6.666 34.157,6.666 34.161,6.666 34.165,6.666 34.169,6.666 34.173,6.666 34.177,6.666 34.181,6.666 34.187,6.666 34.193,6.666 34.199,6.666 34.205,6.666 34.211,6.666 34.217,6.666 34.224,6.666 34.23,6.666 34.236,6.666 34.242,6.666 34.248,6.666 34.254,6.666 34.26,6.666 34.266,6.666 34.272,6.666 34.278,6.666 34.284,6.666 34.291,6.665 34.297,6.665 34.303,6.665 34.309,6.665 34.315,6.665 34.321,6.665 34.327,6.665 34.333,6.665 34.34,6.665 34.346,6.665 34.352,6.665 34.358,6.665 34.364,6.665 34.37,6.665 34.378,6.665 34.387,6.665 34.395,6.665 34.403,6.665 34.411,6.665 34.419,6.665 34.428,6.665 34.436,6.665 34.444,6.666 34.452,6.666 34.461,6.666 34.469,6.666 34.477,6.666 34.485,6.666 34.493,6.666 34.502,6.666 34.51,6.666 34.518,6.666 34.526,6.666 34.535,6.666 34.543,6.666 34.551,6.666 34.559,6.666 34.568,6.666 34.576,6.666 34.584,6.666 34.592,6.666 34.601,6.666 34.611,6.667 34.621,6.667 34.632,6.667 34.642,6.667 34.652,6.667 34.663,6.667 34.673,6.667 34.683,6.667 34.694,6.668 34.704,6.668 34.714,6.668 34.725,6.668 34.735,6.668 34.746,6.669 34.756,6.669 34.766,6.669 34.777,6.669 34.787,6.669 34.797,6.67 34.808,6.67 34.818,6.67 34.828,6.67 34.839,6.67 34.849,6.671 34.86,6.671 34.87,6.671 34.88,6.671 34.891,6.672 34.903,6.672 34.916,6.672 34.928,6.673 34.94,6.673 34.953,6.674 34.965,6.674 34.978,6.674 34.99,6.675 35.003,6.675 35.015,6.676 35.027,6.676 35.04,6.677 35.052,6.677 35.065,6.678 35.077,6.678 35.089,6.679 35.102,6.679 35.114,6.68 35.127,6.68 35.139,6.681 35.151,6.681 35.164,6.682 35.176,6.683 35.189,6.683 35.201,6.684 35.213,6.684 35.226,6.685 35.238,6.686 35.25,6.686 35.263,6.687 35.275,6.688 35.287,6.689 35.3,6.689 35.312,6.69 35.324,6.691 35.337,6.692 35.349,6.692 35.361,6.693 35.373,6.694 35.386,6.695 35.398,6.696 35.41,6.697 35.422,6.698 35.435,6.698 35.447,6.699 35.459,6.7 35.471,6.701 35.483,6.702 35.496,6.703 35.508,6.704 35.52,6.705 35.532,6.706 35.544,6.707 35.556,6.708 35.568,6.71 35.58,6.711 35.593,6.712 35.605,6.713 35.617,6.714 35.629,6.715 35.641,6.716 35.653,6.718 35.665,6.719 35.677,6.72 35.689,6.721 35.701,6.723 35.713,6.724 35.725,6.725 35.737,6.727 35.748,6.728 35.76,6.729 35.772,6.731 35.784,6.732 35.796,6.734 35.808,6.735 35.82,6.737 35.833,6.738 35.838,6.733 ccw(c41.327,10.799) 35.949,6.586 ccw(c41.272,10.756) 36.074,6.432 ccw(c41.219,10.712) 36.211,6.272 ccw(c41.168,10.667) 36.368,6.102 ccw(c41.119,10.621) 36.554,5.913 ccw(c41.073,10.573) 36.79,5.696 ccw(c40.999,10.485) 38.17,4.771 ccw(c41.019,10.526) 38.565,4.592 ccw(c41.045,10.588) 38.848,4.482 ccw(c41.067,10.651) 39.083,4.403 ccw(c41.088,10.715) 39.288,4.341 ccw(c41.106,10.779) 39.475,4.291 ccw(c41.123,10.846) 39.651,4.25 ccw(c41.138,10.914) 39.814,4.215 ccw(c41.151,10.983) 39.965,4.187 ccw(c41.163,11.051) 40.11,4.164 ccw(c41.174,11.121) 40.248,4.144 ccw(c41.183,11.191) 40.381,4.127 ccw(c41.192,11.263) 40.514,4.114 ccw(c41.199,11.337) 40.641,4.103 ccw(c41.204,11.413) 40.769,4.094 40.89,4.088 41.012,4.083 41.127,4.081 41.242,4.081 41.35,4.082 41.459,4.085 41.568,4.089 41.678,4.095 41.78,4.101 41.883,4.109 41.987,4.119 42.09,4.129 42.194,4.142 ccw(c41.487,9.898) 42.319,4.158 ccw(c41.482,9.932) 42.649,4.216 ccw(c41.47,9.991) 42.898,4.272 ccw(c41.455,10.049) 43.113,4.33 ccw(c41.439,10.108) 43.307,4.39 ccw(c41.42,10.166) 43.483,4.45 ccw(c41.398,10.224) 43.652,4.514 ccw(c41.376,10.282) 43.809,4.579 ccw(c41.351,10.34) 43.965,4.648 ccw(c41.324,10.398) 44.114,4.719 ccw(c41.296,10.456) 44.261,4.793 ccw(c41.266,10.513) 44.406,4.872 ccw(c41.234,10.57) 44.549,4.954 ccw(c41.201,10.627) 44.695,5.042 ccw(c41.165,10.684) 44.842,5.137 ccw(c41.128,10.74) 44.992,5.239 ccw(c41.088,10.796) 45.146,5.351 ccw(c41.047,10.852) 45.306,5.474 ccw(c41.004,10.907) 45.474,5.611 ccw(c40.958,10.96) 45.653,5.768 ccw(c40.911,11.013) 45.857,5.959 ccw(c40.86,11.065) 46.102,6.212 ccw(c40.802,11.118) 46.53,6.719 46.797,6.718 46.809,6.718 46.821,6.718 46.834,6.718 46.846,6.718 46.858,6.718 46.87,6.718 46.883,6.718 46.895,6.719 46.907,6.719 46.917,6.719 46.928,6.719 46.938,6.719 46.948,6.719 46.958,6.719 46.968,6.719 46.979,6.719 46.989,6.719 46.999,6.719 47.009,6.719 47.019,6.719 47.03,6.719 47.04,6.719 47.05,6.719 47.06,6.719 47.07,6.719 47.081,6.719 47.091,6.72 47.101,6.72 47.111,6.72 47.121,6.72 47.13,6.72 47.138,6.72 47.146,6.72 47.154,6.72 47.162,6.72 47.17,6.72 47.179,6.72 47.187,6.72 47.195,6.72 47.203,6.721 47.211,6.721 47.22,6.721 47.228,6.721 47.236,6.721 47.244,6.721 47.252,6.721 47.26,6.721 47.269,6.721 47.277,6.721 47.285,6.721 47.293,6.722 47.301,6.722 47.309,6.722 47.318,6.722 47.326,6.722 47.332,6.722 47.338,6.722 47.344,6.722 47.35,6.722 47.356,6.722 47.363,6.722 47.369,6.722 47.375,6.723 47.381,6.723 47.387,6.723 47.393,6.723 47.399,6.723 47.405,6.723 47.412,6.723 47.418,6.723 47.424,6.723 47.43,6.723 47.436,6.723 47.442,6.723 47.448,6.724 47.454,6.724 47.461,6.724 47.467,6.724 47.473,6.724 47.479,6.724 47.485,6.724 47.491,6.724 47.497,6.724 47.504,6.724 47.51,6.724 47.516,6.724 47.522,6.725 47.528,6.725 47.534,6.725 47.538,6.725 47.542,6.725 47.546,6.725 47.551,6.725 47.555,6.725 47.559,6.725 47.563,6.725 47.567,6.725 47.571,6.725 47.575,6.725 47.579,6.725 47.583,6.726 47.587,6.726 47.591,6.726 47.596,6.726 47.6,6.726 47.604,6.726 47.608,6.726 47.612,6.726 47.616,6.726 47.62,6.726 47.624,6.726 47.628,6.726 47.632,6.726 47.636,6.726 47.64,6.726 47.645,6.726 47.649,6.727 47.653,6.727 47.657,6.727 47.661,6.727 47.665,6.727 47.669,6.727 47.673,6.727 47.677,6.727 47.681,6.727 47.685,6.727 47.69,6.727 47.694,6.727 47.698,6.727 47.702,6.727 47.706,6.727 47.71,6.728 47.714,6.728 47.718,6.728 47.722,6.728 47.726,6.728 47.73,6.728 47.735,6.728 47.739,6.728 47.743,6.728 47.745,6.728 47.747,6.728 47.749,6.728 47.751,6.728 47.753,6.728 47.755,6.728 47.757,6.728 47.759,6.728 47.761,6.728 47.763,6.728 47.765,6.728 47.767,6.729 47.769,6.729 47.771,6.729 47.773,6.729 47.775,6.729 47.777,6.729 47.779,6.729 47.782,6.729 47.784,6.729 47.786,6.729 47.788,6.729 47.79,6.729 47.792,6.729 47.794,6.729 47.796,6.729 47.798,6.729 47.8,6.729 47.802,6.729 47.804,6.729 47.806,6.729 47.808,6.729 47.81,6.729 47.812,6.729 47.814,6.729 47.816,6.729 47.818,6.729 47.82,6.729 47.822,6.729 47.824,6.73 47.827,6.73 47.829,6.73 47.831,6.73 47.833,6.73 47.835,6.73 47.837,6.73 47.839,6.73 47.841,6.73 47.843,6.73 47.845,6.73 47.847,6.73 47.849,6.73 47.851,6.73 47.853,6.73 47.855,6.73 47.857,6.73 47.859,6.73 47.861,6.73 47.863,6.73 47.865,6.73 47.867,6.73 47.869,6.73 47.871,6.73 47.874,6.73 47.876,6.73 47.878,6.73 47.88,6.73 47.882,6.73 47.884,6.731 47.886,6.731 47.888,6.731 47.89,6.731 47.892,6.731 47.894,6.731 47.896,6.731 47.898,6.731 47.9,6.731 47.902,6.731 47.904,6.731 47.906,6.731 47.908,6.731 47.91,6.731 47.912,6.731 47.914,6.731 47.916,6.731 47.918,6.731 47.921,6.731 47.923,6.731 47.925,6.731 47.927,6.731 47.929,6.731 47.931,6.731 47.933,6.731 47.935,6.731 47.937,6.731 47.939,6.731 47.941,6.732 47.943,6.732 47.945,6.732 47.947,6.732 47.949,6.732 47.951,6.732 47.953,6.732 47.955,6.732 47.957,6.732 47.959,6.732 47.961,6.732 47.963,6.732 47.966,6.732 47.968,6.732 47.97,6.732 47.972,6.732 47.974,6.732 47.976,6.732 47.978,6.732 47.98,6.732 47.982,6.732 47.984,6.732 47.986,6.732 47.988,6.732 47.99,6.732 47.992,6.732 47.994,6.732 47.996,6.732 47.998,6.733 48,6.733 48.002,6.733 48.004,6.733 48.006,6.733 48.008,6.733 48.01,6.733 48.013,6.733 48.015,6.733 48.017,6.733 48.019,6.733 48.021,6.733 48.023,6.733 48.025,6.733 48.027,6.733 48.029,6.733 48.031,6.733 48.033,6.733 48.035,6.733 48.037,6.733 48.039,6.733 48.041,6.733 48.043,6.733 48.045,6.733 48.047,6.733 48.049,6.733 48.051,6.733 48.053,6.733 48.055,6.734 48.058,6.734 48.06,6.734 48.062,6.734 48.064,6.734 48.066,6.734 48.068,6.734 48.07,6.734 48.072,6.734 48.074,6.734 48.076,6.734 48.078,6.734 48.08,6.734 48.082,6.734 48.084,6.734 48.086,6.734 48.088,6.734 48.09,6.734 48.092,6.734 48.094,6.734 48.096,6.734 48.098,6.734 48.1,6.734 48.102,6.734 48.105,6.734 48.107,6.734 48.109,6.734 48.111,6.734 48.113,6.734 48.115,6.735 48.117,6.735 48.119,6.735 48.121,6.735 48.123,6.735 48.125,6.735 48.127,6.735 48.129,6.735 48.131,6.735 48.133,6.735 48.135,6.735 48.137,6.735 48.139,6.735 48.141,6.735 48.143,6.735 48.145,6.735 48.147,6.735 48.15,6.735 48.154,6.735 48.158,6.735 48.162,6.735 48.166,6.735 48.17,6.735 48.174,6.736 48.178,6.736 48.182,6.736 48.186,6.736 48.19,6.736 48.194,6.736 48.199,6.736 48.203,6.736 48.207,6.736 48.211,6.736 48.215,6.736 48.219,6.736 48.223,6.736 48.227,6.736 48.231,6.736 48.235,6.737 48.239,6.737 48.244,6.737 48.248,6.737 48.252,6.737 48.256,6.737 48.26,6.737 48.264,6.737 48.268,6.737 48.272,6.737 48.276,6.737 48.28,6.737 48.284,6.737 48.289,6.737 48.293,6.737 48.297,6.738 48.301,6.738 48.305,6.738 48.309,6.738 48.313,6.738 48.317,6.738 48.321,6.738 48.325,6.738 48.329,6.738 48.333,6.738 48.338,6.738 48.342,6.738 48.346,6.738 48.35,6.738 48.354,6.738 48.36,6.739 48.366,6.739 48.372,6.739 48.378,6.739 48.385,6.739 48.391,6.739 48.397,6.739 48.403,6.739 48.409,6.739 48.415,6.739 48.421,6.739 48.428,6.739 48.434,6.74 48.44,6.74 48.446,6.74 48.452,6.74 48.458,6.74 48.464,6.74 48.47,6.74 48.477,6.74 48.483,6.74 48.489,6.74 48.495,6.74 48.501,6.741 48.507,6.741 48.513,6.741 48.519,6.741 48.526,6.741 48.532,6.741 48.538,6.741 48.544,6.741 48.55,6.741 48.556,6.741 48.562,6.741 48.571,6.741 48.579,6.741 48.587,6.742 48.595,6.742 48.603,6.742 48.611,6.742 48.62,6.742 48.628,6.742 48.636,6.742 48.644,6.742 48.652,6.742 48.66,6.742 48.669,6.743 48.677,6.743 48.685,6.743 48.693,6.743 48.701,6.743 48.709,6.743 48.718,6.743 48.726,6.743 48.734,6.743 48.742,6.743 48.75,6.743 48.759,6.743 48.767,6.743 48.777,6.744 48.787,6.744 48.797,6.744 48.808,6.744 48.818,6.744 48.828,6.744 48.84,6.744 48.842,6.744 48.846,6.744 48.849,6.744 48.853,6.744 48.856,6.744 48.86,6.744 48.863,6.744 48.867,6.744 48.87,6.744 48.874,6.744 48.877,6.744 48.881,6.744 48.885,6.744 48.888,6.744 48.892,6.744 48.895,6.744 48.899,6.744 48.902,6.744 48.906,6.744 48.909,6.744 48.913,6.744 48.917,6.744 48.922,6.744 48.926,6.745 48.931,6.745 48.935,6.745 48.94,6.745 48.944,6.745 48.949,6.745 48.953,6.745 48.957,6.745 48.962,6.745 48.966,6.745 48.971,6.745 48.975,6.745 48.98,6.745 48.984,6.745 48.988,6.745 48.993,6.745 48.997,6.745 49.002,6.745 49.007,6.745 49.012,6.745 49.018,6.745 49.023,6.745 49.028,6.745 49.034,6.745 49.039,6.745 49.044,6.745 49.05,6.745 49.055,6.745 49.06,6.745 49.066,6.745 49.071,6.745 49.076,6.745 49.082,6.745 49.087,6.745 49.093,6.745 49.1,6.745 49.106,6.745 49.112,6.745 49.118,6.745 49.124,6.745 49.131,6.745 49.137,6.745 49.143,6.745 49.149,6.745 49.156,6.745 49.162,6.745 49.168,6.745 49.174,6.745 49.18,6.746 49.188,6.746 49.195,6.746 49.202,6.746 49.209,6.746 49.216,6.746 49.223,6.746 49.23,6.746 49.237,6.746 49.244,6.746 49.251,6.746 49.259,6.746 49.266,6.746 49.274,6.746 49.282,6.746 49.29,6.746 49.298,6.746 49.306,6.746 49.314,6.746 49.322,6.746 49.33,6.746 49.338,6.746 49.346,6.746 49.354,6.746 49.363,6.745 49.371,6.745 49.38,6.745 49.389,6.745 49.398,6.745 49.407,6.745 49.416,6.745 49.425,6.745 49.434,6.745 49.443,6.745 49.451,6.745 49.461,6.745 49.471,6.745 49.481,6.745 49.491,6.745 49.5,6.745 49.51,6.745 49.52,6.745 49.53,6.745 49.539,6.745 49.55,6.745 49.561,6.745 49.571,6.745 49.582,6.744 49.593,6.744 49.603,6.744 49.614,6.744 49.625,6.744 49.635,6.744 49.647,6.744 49.659,6.744 49.67,6.744 49.682,6.743 49.693,6.743 49.705,6.743 49.716,6.743 49.729,6.743 49.729,6.737 49.729,6.731 49.729,6.725 49.729,6.719 49.729,6.713 49.729,6.707 49.729,6.702 49.729,6.696 49.728,6.69 49.728,6.684 49.728,6.678 49.728,6.672 49.728,6.666 49.728,6.66 49.728,6.654 49.728,6.648 49.728,6.642 49.728,6.637 49.728,6.631 49.728,6.625 49.728,6.619 49.728,6.613 49.728,6.607 49.728,6.601 49.728,6.595 49.728,6.589 49.728,6.584 49.727,6.578 49.727,6.572 49.727,6.566 49.727,6.56 49.727,6.554 49.727,6.548 49.727,6.543 49.727,6.537 49.727,6.531 49.727,6.526 49.727,6.521 49.727,6.516 49.726,6.511 49.726,6.507 49.726,6.502 49.726,6.497 49.726,6.492 49.726,6.487 49.726,6.482 49.726,6.478 49.726,6.473 49.726,6.468 49.726,6.463 49.726,6.458 49.725,6.453 49.725,6.449 49.725,6.444 49.725,6.439 49.725,6.434 49.725,6.43 49.725,6.425 49.725,6.42 49.725,6.415 49.725,6.411 49.725,6.408 49.724,6.404 49.724,6.4 49.724,6.396 49.724,6.392 49.724,6.389 49.724,6.385 49.724,6.381 49.724,6.377 49.724,6.373 49.724,6.37 49.724,6.366 49.724,6.362 49.723,6.358 49.723,6.355 49.723,6.351 49.723,6.347 49.723,6.343 49.723,6.34 49.723,6.336 49.723,6.332 49.723,6.328 49.723,6.326 49.723,6.323 49.723,6.32 49.723,6.317 49.722,6.315 49.722,6.312 49.722,6.309 49.722,6.306 49.722,6.303 49.722,6.301 49.722,6.298 49.722,6.295 49.722,6.292 49.722,6.29 49.722,6.287 49.722,6.284 49.722,6.281 49.722,6.279 49.722,6.276 49.721,6.273 49.721,6.27 49.721,6.268 49.721,6.265 49.721,6.262 49.721,6.259 49.721,6.257 49.721,6.254 49.721,6.252 49.721,6.25 49.721,6.249 49.721,6.247 49.721,6.245 49.721,6.243 49.721,6.241 49.721,6.24 49.721,6.238 49.721,6.236 49.721,6.234 49.72,6.232 49.72,6.231 49.72,6.229 49.72,6.227 49.72,6.225 49.72,6.223 49.72,6.222 49.72,6.22 49.72,6.218 49.72,6.216 49.72,6.214 49.72,6.213 49.72,6.211 49.72,6.209 49.72,6.207 49.72,6.205 49.72,6.204 49.72,6.202 49.72,6.2 49.72,6.198 49.72,6.197 49.719,6.195 49.719,6.193 49.719,6.191 49.719,6.19 49.719,6.188 49.719,6.186 49.719,6.184 49.719,6.183 49.719,6.181 ; 30.306,43.658 30.306,43.659 30.306,43.661 30.306,43.663 30.306,43.664 30.306,43.666 30.306,43.668 30.306,43.669 30.306,43.671 30.306,43.673 30.306,43.675 30.306,43.676 30.306,43.678 30.306,43.68 30.306,43.681 30.307,43.683 30.307,43.685 30.307,43.686 30.307,43.688 30.307,43.69 30.307,43.691 30.307,43.693 30.307,43.695 30.307,43.697 30.307,43.699 30.307,43.701 30.307,43.703 30.307,43.706 30.307,43.708 30.307,43.71 30.307,43.712 30.307,43.714 30.307,43.716 30.307,43.718 30.307,43.721 30.307,43.723 30.307,43.725 30.307,43.727 30.308,43.729 30.308,43.731 30.308,43.733 30.308,43.736 30.308,43.739 30.308,43.741 30.308,43.744 30.308,43.746 30.308,43.749 30.308,43.752 30.308,43.754 30.308,43.757 30.308,43.759 30.308,43.762 30.308,43.765 30.308,43.767 30.308,43.77 30.308,43.772 30.308,43.775 30.308,43.778 30.308,43.78 30.309,43.783 30.309,43.786 30.309,43.79 30.309,43.793 30.309,43.796 30.309,43.799 30.309,43.802 30.309,43.805 30.309,43.808 30.309,43.811 30.309,43.814 30.309,43.817 30.309,43.82 30.309,43.823 30.309,43.826 30.309,43.829 30.309,43.833 30.309,43.835 cw(c32.836,47.757) 28.17,47.757 cw(c32.907,47.757) 28.177,48.003 cw(c32.858,47.76) 28.206,48.335 cw(c32.835,47.755) 32.588,52.414 cw(c32.834,47.683) 32.834,52.421 cw(c32.834,47.682) 33.07,52.415 cw(c32.837,47.731) 33.388,52.388 cw(c32.845,47.79) 34.595,52.076 cw(c39.237,51.675) 34.661,52.548 cw(c39.221,51.676) 35.58,54.557 cw(c39.255,51.656) 37.314,55.917 cw(c39.232,51.698) 38.829,56.315 cw(c39.24,51.623) 39.111,56.331 cw(c39.242,51.585) 39.242,56.333 cw(c39.242,51.582) 39.428,56.329 cw(c39.244,51.629) 39.638,56.316 cw(c39.248,51.676) 39.882,56.289 39.959,56.278 cw(c44.588,56.956) 39.91,56.957 cw(c44.648,56.957) 39.916,57.202 cw(c44.599,56.96) 39.945,57.535 cw(c44.575,56.955) 44.328,61.614 cw(c44.573,56.882) 44.574,61.62 cw(c44.574,56.884) 44.82,61.614 cw(c44.576,56.932) 45.15,61.585 cw(c44.57,56.953) 49.05,58.267 cw(c52.195,54.807) 50.073,58.973 cw(c52.176,54.843) 51.823,59.464 cw(c52.185,54.76) 52.092,59.477 cw(c52.185,54.724) 52.185,59.478 cw(c52.186,54.741) 52.431,59.472 cw(c52.188,54.79) 52.763,59.442 cw(c52.184,54.813) 56.843,55.06 cw(c52.112,54.815) 56.849,54.814 cw(c52.173,54.814) 56.766,53.938 cw(c59.945,50.51) 57.852,54.69 cw(c59.926,50.546) 59.558,55.166 cw(c59.935,50.465) 59.83,55.18 cw(c59.936,50.428) 59.936,55.181 cw(c59.936,50.444) 60.182,55.175 cw(c59.939,50.493) 60.514,55.146 cw(c59.934,50.516) 64.593,50.771 cw(c59.863,50.518) 64.599,50.525 64.599,50.517 cw(c59.862,50.517) 64.593,50.275 cw(c59.91,50.515) 64.565,49.947 cw(c59.942,50.515) 62.898,46.915 cw(c59.446,43.761) 63.623,45.863 cw(c59.483,43.781) 64.104,44.135 cw(c59.4,43.772) 64.117,43.865 cw(c59.365,43.771) 64.118,43.771 cw(c59.446,43.77) 64.061,43.047 cw(c59.45,43.773) 61.995,39.859 61.997,37.983 61.996,37.953 61.996,37.951